# EAGLE board operator-interface-panel-r1.1 (EAGLE 5.12)
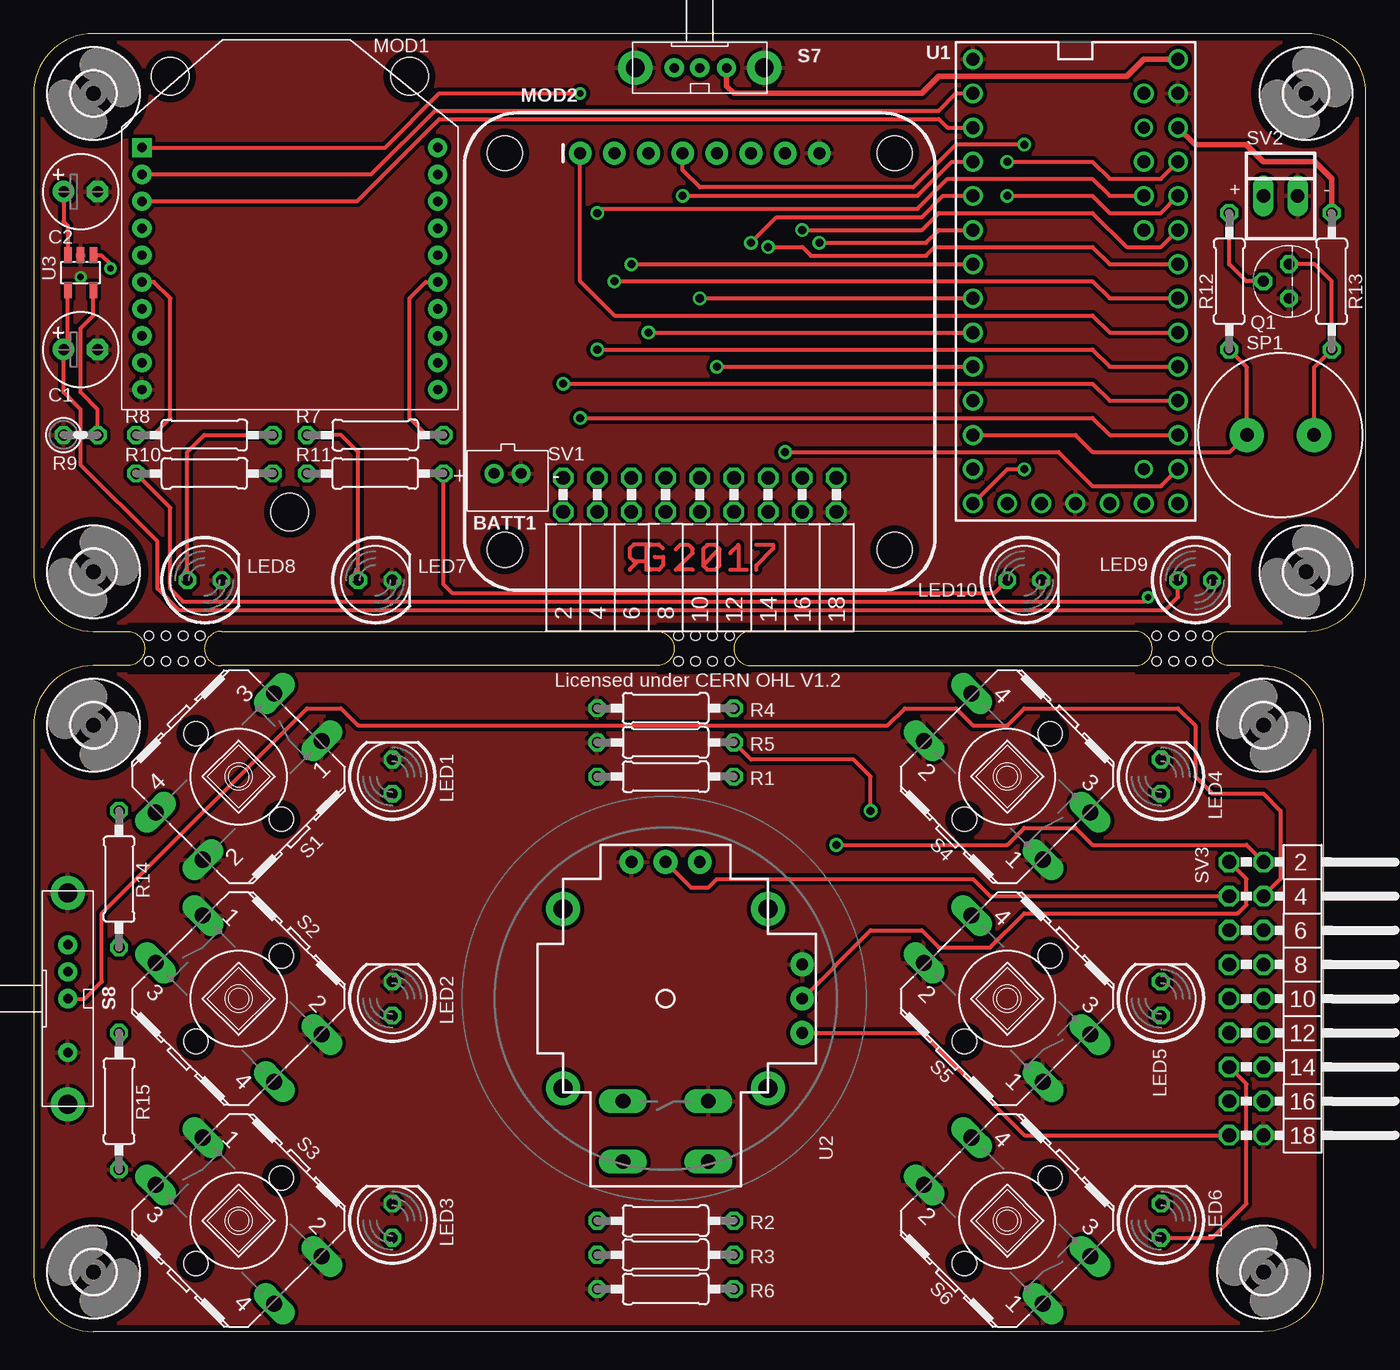
[diagram p0: board, top side]
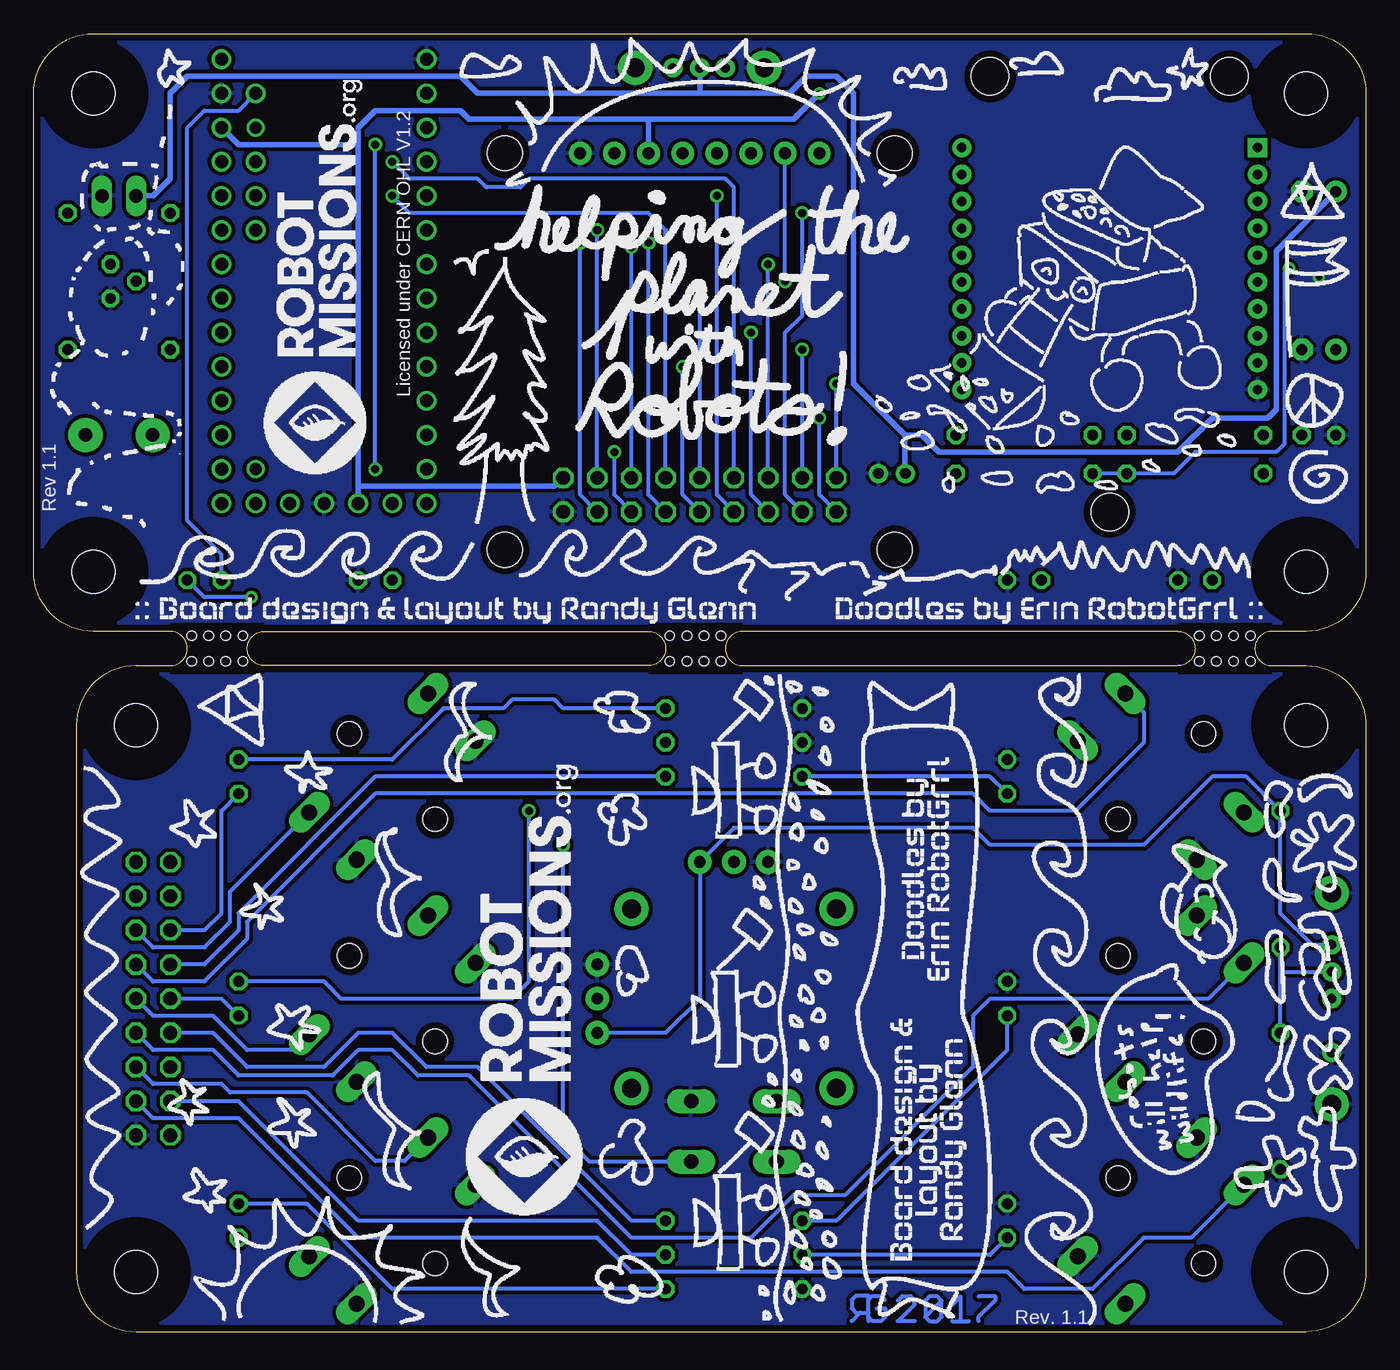
[diagram p1: board, bottom side, seen from below]

Size 99.06 x 96.52 mm. Coordinates in mm from the lower left corner, seen from the top.
Outline: 94.62,52.07 arc90 99.06,56.51 99.06,92.07 arc90 94.62,96.52 4.45,96.52 arc90 0,92.07 0,56.51 arc90 4.45,52.07 6.98,52.07 arc-90 8.26,50.8 arc-90 6.98,49.53 4.45,49.53 arc90 0,45.09 0,4.45 arc90 4.45,0 91.44,0 arc90 95.88,4.45 95.88,45.09 arc90 91.44,49.53 88.9,49.53 arc-90 87.63,50.8 arc-90 88.9,52.07 94.62,52.07
Outline: 13.97,52.07 arc90 12.7,50.8 arc90 13.97,49.53 46.36,49.53 arc90 47.62,50.8 arc90 46.36,52.07 13.97,52.07
Outline: 81.91,49.53 arc90 83.19,50.8 arc90 81.91,52.07 53.34,52.07 arc90 52.07,50.8 arc90 53.34,49.53 81.91,49.53
Copper layers (1*16): Top 0.035mm / dielectric 1.5mm / Bottom 0.035mm
Design rules "default *": minimum track width 10mil, minimum drill 0.5mm, track to track 11mil, track to pad 11mil, pad to pad 11mil, via to via 11mil, smd to smd 11mil, copper to edge 20mil, drill to drill 8mil, minimum pad ring 10mil, minimum via ring 8mil, stop-mask expansion 4mil, vias tented up to drill 25mil, thermal gap 10mil
Holes 2.8 mm at 10.16,93.34 27.94,93.34 19.05,60.96
Holes 0.7 mm at 8.57,51.75 9.84,51.75 11.11,51.75 12.38,51.75 8.57,49.85 11.11,49.85 9.84,49.85 12.38,49.85 87.31,49.85 86.04,49.85 84.77,49.85 83.5,49.85 87.31,51.75 84.77,51.75 86.04,51.75 83.5,51.75 47.94,51.75 49.21,51.75 50.48,51.75 51.75,51.75 47.94,49.85 50.48,49.85 49.21,49.85 51.75,49.85
tRestrict: area 7,48.9 to 14,52.7; area 81.9,48.9 to 88.9,52.7; area 46.4,48.9 to 53.3,52.7
bRestrict: area 7,48.9 to 14,52.7; area 81.9,48.9 to 88.9,52.7; area 46.4,48.9 to 53.3,52.7

## Footprints (pad centres in the part's own frame; a part is rotated, then mirrored left to right if it is on the bottom)
JST-PH-2-THM = drill 0.8 pad 1.422 round: 1 1,0; 2 -1,0
E2,5-6 = drill 0.813 pad 1.6 round: + -1.27,0 | drill 0.813 pad 1.6 octagon: - 1.27,0
3,2 = hole 3.2: 0,0
LED5MM = drill 0.813 octagon: A -1.27,0; K 1.27,0
XBEE = drill 0.7 pad 1.422 square: 1 -11,5.5 | drill 0.7 pad 1.422 round: 2 -11,3.5; 3 -11,1.5; 4 -11,-0.5; 5 -11,-2.5; 6 -11,-4.5; 7 -11,-6.5; 8 -11,-8.5; 9 -11,-10.5; 10 -11,-12.5; 11 11,-12.5; 12 11,-10.5; 13 11,-8.5; 14 11,-6.5; 15 11,-4.5; 16 11,-2.5; 17 11,-0.5; 18 11,1.5; 19 11,3.5; 20 11,5.5
ADAFRUIT-OLED-1.3 = drill 0.9 pad 1.676 round: 1 -8.89,0; 2 -6.35,0; 3 -3.81,0; 4 -1.27,0; 5 1.27,0; 6 3.81,0; 7 6.35,0; 8 8.89,0 | hole 2.6: -14.5,0; 14.5,0; -14.5,-29.5; 14.5,-29.5
TO92 = drill 0.813 octagon: 1 1.27,0; 2 0,1.905; 3 -1.27,0
0207/10 = drill 0.813 octagon: 1 -5.08,0; 2 5.08,0
0207/2V = drill 0.813 octagon: 1 -1.27,0; 2 1.27,0
B3F-40XX = drill 1.194 long: 1 -6.248,2.489; 2 6.248,2.489; 3 -6.248,-2.489; 4 6.248,-2.489 | hole 1.803: 0,-4.496; 0,4.496
EG1213 = drill 0.7 pad 1.422 round: 1 -2,0; 2 0,0; 3 1.9,0 | drill 1.4 pad 2.54 round: MT1 -4.8,0; MT2 4.8,0
EG1313 = drill 0.7 pad 1.422 round: 1 -4,0; 2 -2,0; 3 0,0; 4 4,0 | drill 1.4 pad 2.54 round: MT1 -7.85,0; MT2 7.85,0
PS12 = drill 1 pad 2.54 round: P$1 -2.5,0; P$2 2.5,0
FE09-2W = drill 1.016 octagon: 1 -10.16,1.27; 2 -10.16,-1.27; 3 -7.62,1.27; 4 -7.62,-1.27; 5 -5.08,1.27; 6 -5.08,-1.27; 7 -2.54,1.27; 8 -2.54,-1.27; 9 0,1.27; 10 0,-1.27; 11 2.54,1.27; 12 2.54,-1.27; 13 5.08,1.27; 14 5.08,-1.27; 15 7.62,1.27; 16 7.62,-1.27; 17 10.16,1.27; 18 10.16,-1.27
22-23-2021 = drill 1 long: 1 -1.27,0; 2 1.27,0
MA09-2W = drill 1.016 octagon: 1 -10.16,-1.27; 2 -10.16,1.27; 3 -7.62,-1.27; 4 -7.62,1.27; 5 -5.08,-1.27; 6 -5.08,1.27; 7 -2.54,-1.27; 8 -2.54,1.27; 9 0,-1.27; 10 0,1.27; 11 2.54,-1.27; 12 2.54,1.27; 13 5.08,-1.27; 14 5.08,1.27; 15 7.62,-1.27; 16 7.62,1.27; 17 10.16,-1.27; 18 10.16,1.27
TEENSY_3.0+4 = drill 0.965 round: 0 -7.62,13.97; 1 -7.62,11.43; 2 -7.62,8.89; 3 -7.62,6.35; 3.3V 7.62,11.43; 3.3V1 -2.54,-16.51; 4 -7.62,3.81; 5 -7.62,1.27; 6 -7.62,-1.27; 7 -7.62,-3.81; 8 -7.62,-6.35; 9 -7.62,-8.89; 10 -7.62,-11.43; 11 -7.62,-13.97; 12 -7.62,-16.51; 13 7.62,-16.51; 14/A0 7.62,-13.97; 15/A1 7.62,-11.43; 16/A2 7.62,-8.89; 17/A3 7.62,-6.35; 18/A4 7.62,-3.81; 19/A5 7.62,-1.27; 20/A6 7.62,1.27; 21/A7 7.62,3.81; 22/A8 7.62,6.35; 23/A9 7.62,8.89; A10 5.08,6.35; A11 5.08,3.81; AGND 7.62,13.97; AREF 5.08,8.89; GND -7.62,16.51; GND1 0,-16.51; PGM 2.54,-16.51; RESET 5.08,-16.51; VBAT -5.08,-16.51; VIN 7.62,16.51; VUSB 5.08,13.97
JOYSTICK = drill 1.1 pad 1.778 long: B1A -3.175,12.12; B1B 3.175,12.12; B2A -3.175,7.62; B2B 3.175,7.62 | drill 0.889 pad 1.778 round: H1 -2.54,-10.16; H2 0,-10.16; H3 2.54,-10.16; V1 -10.16,2.54; V2 -10.16,0; V3 -10.16,-2.54 | drill 1.397 pad 2.54 round: MOUNT1 -7.62,6.668; MOUNT2 -7.62,-6.668; MOUNT3 7.62,-6.668; MOUNT4 7.62,6.668
SOT23-5L = smd 0.55 x 1.2: 1 -0.95,-1.3; 2 0,-1.3; 3 0.95,-1.3; 4 0.95,1.3; 5 -0.95,1.3

## Placement (x,y rotation side)
BATT1  [JST-PH-2-THM]  35.24,63.82 180 top
C1  10u  [E2,5-6]  3.49,73.03 0 top
C2  10u  [E2,5-6]  3.49,84.77 0 top
H1  MOUNT-HOLE3.2  [3,2]  4.45,92.07 0 top
H2  MOUNT-HOLE3.2  [3,2]  94.62,92.07 0 top
H3  MOUNT-HOLE3.2  [3,2]  94.62,56.51 0 top
H4  MOUNT-HOLE3.2  [3,2]  4.45,56.51 0 top
H5  MOUNT-HOLE3.2  [3,2]  4.45,45.09 270 top
H6  MOUNT-HOLE3.2  [3,2]  4.45,4.45 270 top
H7  MOUNT-HOLE3.2  [3,2]  91.44,45.09 270 top
H8  MOUNT-HOLE3.2  [3,2]  91.44,4.45 270 top
LED1  [LED5MM]  26.67,41.27 90 top
LED2  [LED5MM]  26.67,24.76 90 top
LED3  [LED5MM]  26.67,8.26 90 top
LED4  [LED5MM]  83.82,41.27 90 top
LED5  [LED5MM]  83.82,24.76 90 top
LED6  [LED5MM]  83.82,8.26 90 top
LED7  ASSOC  [LED5MM]  25.4,55.88 0 top
LED8  RSSI  [LED5MM]  12.7,55.88 0 top
LED9  CHARGE  [LED5MM]  86.36,55.88 0 top
LED10  DONE  [LED5MM]  73.66,55.88 0 top
MOD1  XBEE  [XBEE]  19.05,82.55 0 top
MOD2  ADAFRUIT-OLED-1.3  [ADAFRUIT-OLED-1.3]  49.53,87.63 0 top
Q1  2N3904  [TO92]  93.34,78.1 90 top
R1  330  [0207/10]  46.99,41.27 180 top
R2  330  [0207/10]  46.99,8.26 180 top
R3  330  [0207/10]  46.99,5.71 180 top
R4  330  [0207/10]  46.99,46.35 180 top
R5  330  [0207/10]  46.99,43.82 180 top
R6  330  [0207/10]  46.99,3.17 180 top
R7  330  [0207/10]  25.4,66.68 180 top
R8  330  [0207/10]  12.7,66.68 0 top
R9  2.0K  [0207/2V]  3.49,66.68 0 top
R10  330  [0207/10]  12.7,63.82 0 top
R11  330  [0207/10]  25.4,63.82 0 top
R12  2.0K  [0207/10]  88.9,78.1 90 top
R13  330  [0207/10]  96.52,78.1 90 top
R14  10K  [0207/10]  6.35,33.65 90 top
R15  10K  [0207/10]  6.35,17.14 270 top
S1  [B3F-40XX]  15.24,41.27 225 top
S2  [B3F-40XX]  15.24,24.76 315 top
S3  [B3F-40XX]  15.24,8.26 315 top
S4  [B3F-40XX]  72.39,41.27 135 top
S5  [B3F-40XX]  72.39,24.76 135 top
S6  [B3F-40XX]  72.39,8.26 135 top
S7  EG1213  [EG1213]  49.53,93.98 180 top
S8  EG1313  [EG1313]  2.54,24.76 270 top
SP1  SPEAKER/PS12  [PS12]  92.71,66.68 0 top
SV1  [FE09-2W]  49.53,62.23 0 top
SV2  5V IN  [22-23-2021]  92.71,84.45 0 top
SV3  [MA09-2W]  90.17,24.76 270 top
U1  TEENSY_3.2  [TEENSY_3.0+4]  77.47,78.1 0 top
U2  JOYSTICKPTH  [JOYSTICK]  46.99,24.76 180 top
U3  MCP73831/OT  [SOT23-5L]  3.49,78.74 180 top
U$1  [TOP-ART-DISPLAY-1.1]  1.27,52.71 0 top
U$2  [RGLOGO_SMALL_2017]  45.72,56.51 0 top
U$3  [BOTTOM-ART-DISPLAY-1.1]  97.79,52.71 0 bottom
U$4  [OSHW_FILLX150_NOTEXT]  36.83,74.29 0 bottom
U$5  [RGLOGO_SMALL_2017]  36.83,0.63 0 bottom
U$6  [TOP-ART-KEYPAD]  1.27,48.9 270 top
U$7  [BOTTOM-ART-KEYPAD]  0,0 90 bottom
U$8  [OSHW_FILLX150_NOTEXT]  60.33,42.23 90 bottom

## Library data of the parts
BATT1 MOD1 SP1 U2 U3 = adafruit
C1 C2 R1-R15 = rcl
H1-H8 = holes
LED1-LED10 = led
MOD2 S7 S8 U$1 U$3 U$6 U$7 = oled
Q1 = transistor-npn
S1-S6 = switch-omron; MF: OMRON COMPONENTS USA; MPN: B3F-4000; OC_FARNELL: 176434; OC_NEWARK: 36K3105
SV1 = con-lsta; OC_FARNELL: unknown; OC_NEWARK: unknown
SV2 = con-molex; MF: MOLEX; MPN: 22-23-2021; OC_FARNELL: 1462926; OC_NEWARK: 25C3832
SV3 = con-lstb; OC_FARNELL: unknown; OC_NEWARK: unknown
U1 = Teensy3.0-5.12
U$2 U$4 U$5 U$8 = rbg-logos

## Nets
+3V1: R14.2 S8.1 SV3.17 U2.H1 U2.V1
+3V3: MOD1.1 MOD2.6 R13.2 SV1.17 U1.3.3V U1.3.3V1
AREF: U1.AREF
BUTTON1: SV1.8 U1.2
BUTTON2: SV1.12 U1.3
BUTTON3: SV1.16 U1.4
BUTTON4: SV1.6 U1.7
BUTTON5: SV1.10 U1.8
BUTTON6: SV1.14 U1.14/A0
BUTTON7: S1.3 SV3.8
BUTTON8: S2.3 SV3.12
BUTTON9: S3.3 SV3.16
BUTTON10: S4.3 SV3.6
BUTTON11: S5.3 SV3.10
BUTTON12: S6.4 SV3.14
GND: BATT1.2 C1.- C2.- LED7.K LED8.K LED10.K MOD1.10 MOD2.8 Q1.3 R9.1 S7.MT1 S7.MT2 SV1.18 SV2.2 U1.AGND U1.GND U1.GND1 U3.2
GND1: LED1.K LED2.K LED3.K R4.2 R5.2 R6.2 R15.2 S1.1 S1.2 S2.1 S2.2 S3.1 S3.2 S4.1 S4.2 S5.1 S5.2 S6.1 S6.2 S8.4 S8.MT1 S8.MT2 SV3.18 U2.B2A U2.H3 U2.V3
JOYSTICK_BUTTON: SV1.2 U1.15/A1
JOYSTICK_BUTTON1: SV3.2 U2.B1A
JOYSTICK_XAXIS: SV1.1 U1.16/A2
JOYSTICK_XAXIS1: SV3.1 U2.V2
JOYSTICK_YAXIS: SV1.3 U1.17/A3
JOYSTICK_YAXIS1: SV3.3 U2.H2
LED1: SV1.7 U1.23/A9
LED2: SV1.11 U1.22/A8
LED3: SV1.15 U1.21/A7
LED4: SV1.5 U1.5
LED5: SV1.9 U1.6
LED6: SV1.13 U1.20/A6
LED7: LED4.A SV3.5
LED8: LED5.A SV3.9
LED9: R1.1 SV3.7
LED10: R2.1 SV3.11
LED11: R3.1 SV3.15
LED12: LED6.A SV3.13
N$1: LED8.A R8.2
N$2: LED7.A R7.2
N$5: Q1.1 R13.1 SP1.P$2
N$6: Q1.2 R12.2
N$7: LED1.A R1.2
N$8: LED2.A R2.2
N$9: LED3.A R3.2
N$10: R9.2 U3.5
N$11: LED9.K R10.1
N$12: R10.2 R11.1 U3.1
N$13: LED10.A R11.2
N$14: BATT1.1 C2.+ S7.2 SV2.1 U3.3
N$15: R14.1 R15.1 S8.2
N$16: LED4.K R4.1
N$17: LED5.K R5.1
N$18: LED6.K R6.1
OLED_RESET: MOD2.4 U1.12
ORIENTATION: SV1.4 U1.A10
ORIENTATION1: S8.3 SV3.4
PIEZO_SPEAKER: R12.1 SP1.P$1 U1.10
SCL: MOD2.2 U1.19/A5
SDA: MOD2.1 U1.18/A4
SERIAL_IN_FROM_XBEE: MOD1.2 U1.0
SERIAL_OUT_TO_XBEE: MOD1.3 U1.1
VBAT: U1.VBAT
VIN: S7.1 U1.VIN
VUSB: C1.+ LED9.A U1.VUSB U3.4
XBEE_ASSOC: MOD1.15 R7.1
XBEE_RSSI: MOD1.6 R8.1

## Tracks (layer width: path | path; a pad name or v marks a point on that pad's centre or on a via)
+3V1
  Top 0.305: SV3.17 73.66,14.6 66.04,22.23 U2.V1
  Bottom 0.305: S8.1 4,28.76 6.35,31.12 R14.2 8.89,41.27 11.43,41.27 16.51,36.2 27.94,36.2 29.21,37.46 46.99,37.46 U2.H1 49.53,24.76 52.07,22.23 U2.V1
+3V3  (via drill 0.5)
  Top 0.305: v40.64,92.07 30.16,92.07 26.14,88.05 MOD1.1
  Top 0.406: R13.2 96.52,85.72 95.25,87 91.44,87 90.17,88.26 86.36,88.26 U1.3.3V
  Bottom 0.406: 74.93,62.87 U1.3.3V1 | 53.34,90.17 66.67,90.17 67.31,90.8 73.66,90.8 74.93,89.53 74.93,88.26 | 53.34,90.17 MOD2.6 | MOD1.1 8.05,88.06 | 74.93,88.26 74.93,62.87 | 74.93,62.87 60.33,62.87 SV1.17 | U1.3.3V 83.82,88.26 74.93,88.26 | 53.34,90.17 42.55,90.17 v40.64,92.07
BUTTON1  (via drill 0.6)
  Top 0.305: v48.26,84.45 65.72,84.45 68.26,87 U1.2
  Bottom 0.305: v48.26,84.45 48.26,62.23 SV1.8
BUTTON2  (via drill 0.6)
  Top 0.305: U1.3 67.63,84.45 66.04,82.87 55.25,82.87 v53.34,80.96
  Bottom 0.305: v53.34,80.96 53.34,62.23 SV1.12
BUTTON3  (via drill 0.6)
  Top 0.305: v58.42,80.96 66.36,80.96 67.31,81.91 U1.4
  Bottom 0.305: SV1.16 58.42,62.23 v58.42,80.96
BUTTON4  (via drill 0.6)
  Top 0.305: v45.72,74.29 U1.7
  Bottom 0.305: v45.72,74.29 45.72,62.23 SV1.6
BUTTON5  (via drill 0.6)
  Top 0.305: v50.8,71.75 U1.8
  Bottom 0.305: v50.8,71.75 50.8,62.23 SV1.10
BUTTON6  (via drill 0.6)
  Top 0.305: U1.14/A0 83.82,62.87 78.74,62.87 76.2,65.41 v55.88,65.41
  Bottom 0.305: v55.88,65.41 55.88,62.23 SV1.14
BUTTON7
  Bottom 0.305: SV3.8 90.17,26.04 86.36,26.04 83.19,29.21 83.19,30.48 73.66,40.01 29.21,40.01 27.94,38.73 21.59,38.73 16.51,43.82 16.51,46.07 S1.3
BUTTON8
  Bottom 0.305: SV3.12 90.17,20.96 85.72,20.96 83.82,19.05 76.84,19.05 74.93,20.96 72.39,20.96 70.48,19.05 66.67,19.05 54.61,6.98 45.72,6.98 42.55,10.16 38.73,10.16 29.21,19.68 29.21,23.49 27.94,24.76 11.72,24.76 S2.3
BUTTON9
  Bottom 0.305: S3.3 12.99,6.98 16.51,6.98 20.32,3.17 25.4,3.17 26.67,4.45 54.61,4.45 57.15,6.98 74.93,6.98 83.82,15.88 90.17,15.88 SV3.16
BUTTON10
  Bottom 0.305: SV3.6 90.17,28.57 86.36,28.57 84.45,30.48 84.45,32.73 S4.3
BUTTON11
  Bottom 0.305: SV3.10 90.17,23.49 85.72,23.49 83.19,20.96 79.72,20.96 S5.3
BUTTON12
  Bottom 0.305: SV3.14 90.17,18.41 85.09,18.41 84.45,17.78 78.74,17.78 73.66,12.7 71.47,12.7 S6.4
GND  (via drill 0.5)
  other vias: 3.49,78.42
  pour Bottom: -1.27,96.52 -1.27,52.07 100.33,52.07 100.33,96.52
  pour Top: -1.27,96.52 -1.27,52.07 100.33,52.07 100.33,96.52
GND1
  pour Top: 95.88,49.53 0,49.53 0,0 95.88,0
  pour Bottom: 95.88,49.53 0,49.53 0,0 95.88,0
JOYSTICK_BUTTON  (via drill 0.6)
  Top 0.305: v40.64,67.94 78.74,67.94 80.01,66.68 U1.15/A1
  Bottom 0.305: v40.64,67.94 40.64,62.23 SV1.2
JOYSTICK_BUTTON1  (via drill 0.6)
  Top 0.305: SV3.2 90.17,36.2 78.74,36.2 77.47,37.46 73.66,37.46 72.39,36.2 v59.69,36.2
  Bottom 0.305: v59.69,36.2 59.69,14.6 57.73,12.64 U2.B1A
JOYSTICK_XAXIS  (via drill 0.6)
  Top 0.305: U1.16/A2 80.01,69.22 78.74,70.48 v39.37,70.48
  Bottom 0.305: SV1.1 v39.37,70.48
JOYSTICK_XAXIS1
  Top 0.305: SV3.1 90.17,33.65 90.17,31.75 89.53,31.12 73.66,31.12 71.12,28.57 67.31,28.57 66.04,29.85 62.23,29.85 U2.V2
JOYSTICK_YAXIS  (via drill 0.6)
  Top 0.305: U1.17/A3 80.01,71.75 78.74,73.03 v41.91,73.03
  Bottom 0.305: SV1.3 v41.91,73.03
JOYSTICK_YAXIS1
  Top 0.305: SV3.3 71.12,32.38 69.85,33.65 50.8,33.65 50.16,33.02 48.9,33.02 U2.H2
LED1  (via drill 0.6)
  Top 0.305: U1.23/A9 83.82,85.72 80.01,85.72 78.74,87 v72.39,87
  Bottom 0.305: SV1.7 46.99,85.09 47.62,85.72 62.23,85.72 62.87,85.09 65.41,85.09 66.04,85.72 71.12,85.72 v72.39,87
LED2  (via drill 0.6)
  Top 0.305: U1.22/A8 83.82,83.19 80.01,83.19 78.74,84.45 v72.39,84.45
  Bottom 0.305: SV1.11 52.07,81.91 53.34,83.19 71.12,83.19 v72.39,84.45
LED3  (via drill 0.6)
  Top 0.305: v57.15,81.91 66.04,81.91 67.31,83.19 78.74,83.19 81.28,80.65 83.82,80.65 U1.21/A7
  Bottom 0.305: SV1.15 v57.15,81.91
LED4  (via drill 0.6)
  Top 0.305: v44.45,79.38 U1.5
  Bottom 0.305: SV1.5 v44.45,79.38
LED5  (via drill 0.6)
  Top 0.305: v49.53,76.84 U1.6
  Bottom 0.305: SV1.9 v49.53,76.84
LED6  (via drill 0.6)
  Top 0.305: v54.61,80.65 57.15,80.65 57.79,80.01 66.36,80.01 66.99,80.65 78.74,80.65 80.01,79.38 U1.20/A6
  Bottom 0.305: SV1.13 v54.61,80.65
LED7
  Bottom 0.305: SV3.5 86.36,29.85 85.09,31.12 85.09,38.73 LED4.A
LED8
  Bottom 0.305: SV3.9 85.09,24.76 LED5.A
LED9
  Bottom 0.305: SV3.7 86.36,27.3 83.82,29.85 83.82,31.12 73.66,41.27 R1.1
LED10
  Bottom 0.305: SV3.11 85.72,22.23 83.19,19.68 77.47,19.68 74.93,22.23 72.39,22.23 69.85,19.68 66.04,19.68 54.61,8.26 R2.1
LED11
  Bottom 0.305: SV3.15 83.82,17.14 74.93,8.26 57.15,8.26 54.61,5.71 R3.1
LED12
  Top 0.305: SV3.13 90.17,18.41 90.17,9.52 87.63,6.98 LED6.A
N$1
  Top 0.305: LED8.A 11.43,65.41 12.7,66.68 R8.2
N$2
  Top 0.305: LED7.A 24.13,65.41 22.86,66.68 R7.2
N$3  (via drill 0.9)
  other vias: 82.55,89.53
N$4  (via drill 0.9)
  other vias: 82.55,64.13
N$5
  Top 0.305: SP1.P$2 95.21,71.72 R13.1 96.52,78.1 95.25,79.38 Q1.1
N$6
  Top 0.305: R12.2 88.9,79.38 90.17,78.1 Q1.2
N$7
  Bottom 0.305: R1.2 27.94,41.27 LED1.A
N$8
  Bottom 0.305: R2.2 39.37,8.26 26.67,20.96 LED2.A
N$9
  Bottom 0.305: R3.2 27.94,5.71 LED3.A
N$10
  Top 0.305: U3.5 4.44,75.56 3.49,74.61 3.49,69.85 4.76,68.58 R9.2
N$11  (via drill 0.5)
  Top 0.305: v82.87,54.61 82.55,54.29 11.11,54.29 10.16,55.24 10.16,61.28 R10.1
  Bottom 0.305: v82.87,54.61 86.36,54.61 LED9.K
N$12  (via drill 0.5)
  Top 0.305: v5.72,79.06 5.72,79.38 5.08,80.01 4.47,80.01 U3.1
  Bottom 0.305: R11.1 R10.2 14.29,63.82 12.7,65.41 6.67,65.41 6.03,66.04 6.03,78.74 v5.72,79.06
N$13
  Top 0.305: R11.2 30.48,55.56 31.12,54.93 71.44,54.93 LED10.A
N$14
  Top 0.305: U3.3 2.54,82.23 2.22,82.55 C2.+
  Bottom 0.406: 49.53,92.07 42.86,92.07 41.59,93.34 39.37,93.34 38.1,92.07 38.1,70.48 34.29,66.68 | 34.29,66.68 34.29,64.82 BATT1.1 | 34.29,66.68 33.02,66.68 31.75,65.41 13.97,65.41 11.43,67.94 7.3,67.94 6.67,68.58 6.67,80.33 C2.+ | SV2.1 90.17,84.45 88.9,85.72 88.9,92.07 87.63,93.34 67.31,93.34 66.04,92.07 49.53,92.07 | 49.53,92.07 S7.2
N$15
  Bottom 0.305: S8.2 6.26,26.76 6.35,26.67 | 6.35,26.67 R14.1 | R15.1 6.35,26.67
N$16
  Bottom 0.305: LED4.K 72.39,42.54 68.58,46.35 64.14,46.35 63.5,46.99 60.33,46.99 59.69,46.35 R4.1
N$17  (via drill 0.6)
  Top 0.305: R5.1 53.34,42.54 60.96,42.54 62.23,41.27 v62.23,38.73
  Bottom 0.305: v62.23,38.73 62.23,26.04 63.5,24.76 76.2,24.76 77.47,26.04 LED5.K
N$18
  Bottom 0.305: LED6.K 78.74,9.52 72.39,3.17 R6.1
OLED_RESET  (via drill 0.6)
  Top 0.305: MOD2.4 48.26,86.36 49.53,85.09 65.41,85.09 68.58,88.26 v73.66,88.26 | v73.66,64.13 72.39,64.13 U1.12
  Bottom 0.305: v73.66,64.13 v73.66,88.26
ORIENTATION  (via drill 0.6)
  Top 0.305: v41.91,83.19 42.23,83.5 65.72,83.5 67.94,85.72 78.74,85.72 80.01,84.45 U1.A10
  Bottom 0.305: v41.91,83.19 41.91,75.56 43.18,74.29 43.18,62.23 SV1.4
ORIENTATION1
  Top 0.305: SV3.4 92.71,33.65 92.71,38.73 91.44,40.01 87.63,40.01 86.36,41.27 86.36,45.09 85.09,46.35 73.66,46.35 72.39,45.09 69.85,45.09 68.58,46.35 64.77,46.35 63.5,45.09 24.13,45.09 22.86,46.35 20.32,46.35 5.08,31.12 5.08,26.04 3.81,24.76 S8.3
PIEZO_SPEAKER
  Top 0.305: U1.10 77.47,66.68 78.74,65.41 88.94,65.41 SP1.P$1 90.21,71.72 R12.1
SCL  (via drill 0.6)
  Top 0.305: U1.19/A5 80.01,76.84 78.74,78.1 v43.18,78.1
  Bottom 0.305: v43.18,78.1 MOD2.2
SDA
  Top 0.305: U1.18/A4 80.01,74.29 78.74,75.56 43.18,75.56 40.64,78.1 MOD2.1
SERIAL_IN_FROM_XBEE
  Top 0.305: U1.0 68.58,92.07 67.31,90.8 29.85,90.8 25.09,86.05 MOD1.2
SERIAL_OUT_TO_XBEE
  Top 0.305: MOD1.3 24.04,84.05 30.16,90.17 67.31,90.17 67.94,89.53 U1.1
VIN
  Top 0.406: S7.1 51.53,92.61 52.07,92.07 66.04,92.07 67.31,93.34 81.28,93.34 82.55,94.61 U1.VIN
VUSB
  Top 0.305: LED9.A 85.09,54.61 84.14,53.66 10.8,53.66 9.21,55.24 9.21,58.74 3.49,64.45 3.49,68.58 2.22,69.85 C1.+ 2.54,73.34 U3.4
  Bottom 0.305: U1.VUSB 83.82,90.8 86.36,90.8 87.63,89.53 87.63,60.32 85.09,57.79 LED9.A
XBEE_ASSOC
  Top 0.305: MOD1.15 29.16,78.05 27.94,76.84 27.94,67.94 29.21,66.68 R7.1
XBEE_RSSI
  Top 0.305: MOD1.6 8.95,78.05 10.16,76.84 10.16,67.94 8.89,66.68 R8.1

## Text on the board
tNames: + | - | Licensed under CERN OHL V1.2
bNames: Licensed under CERN OHL V1.2 | Rev 1.1 | Rev. 1.1